# Altium PCB 电动手推车PCB.PcbDoc
Units mil, origin at the board's own origin, x right, y up, seen from the top; angles counter-clockwise.
Board outline 3897.64 x 2165.35 mil, 2 copper layers (Top Layer, Bottom Layer); 116 components, 78 nets, 368 pads, 298 vias.
Unrouted connection lines stored in the file: 5.
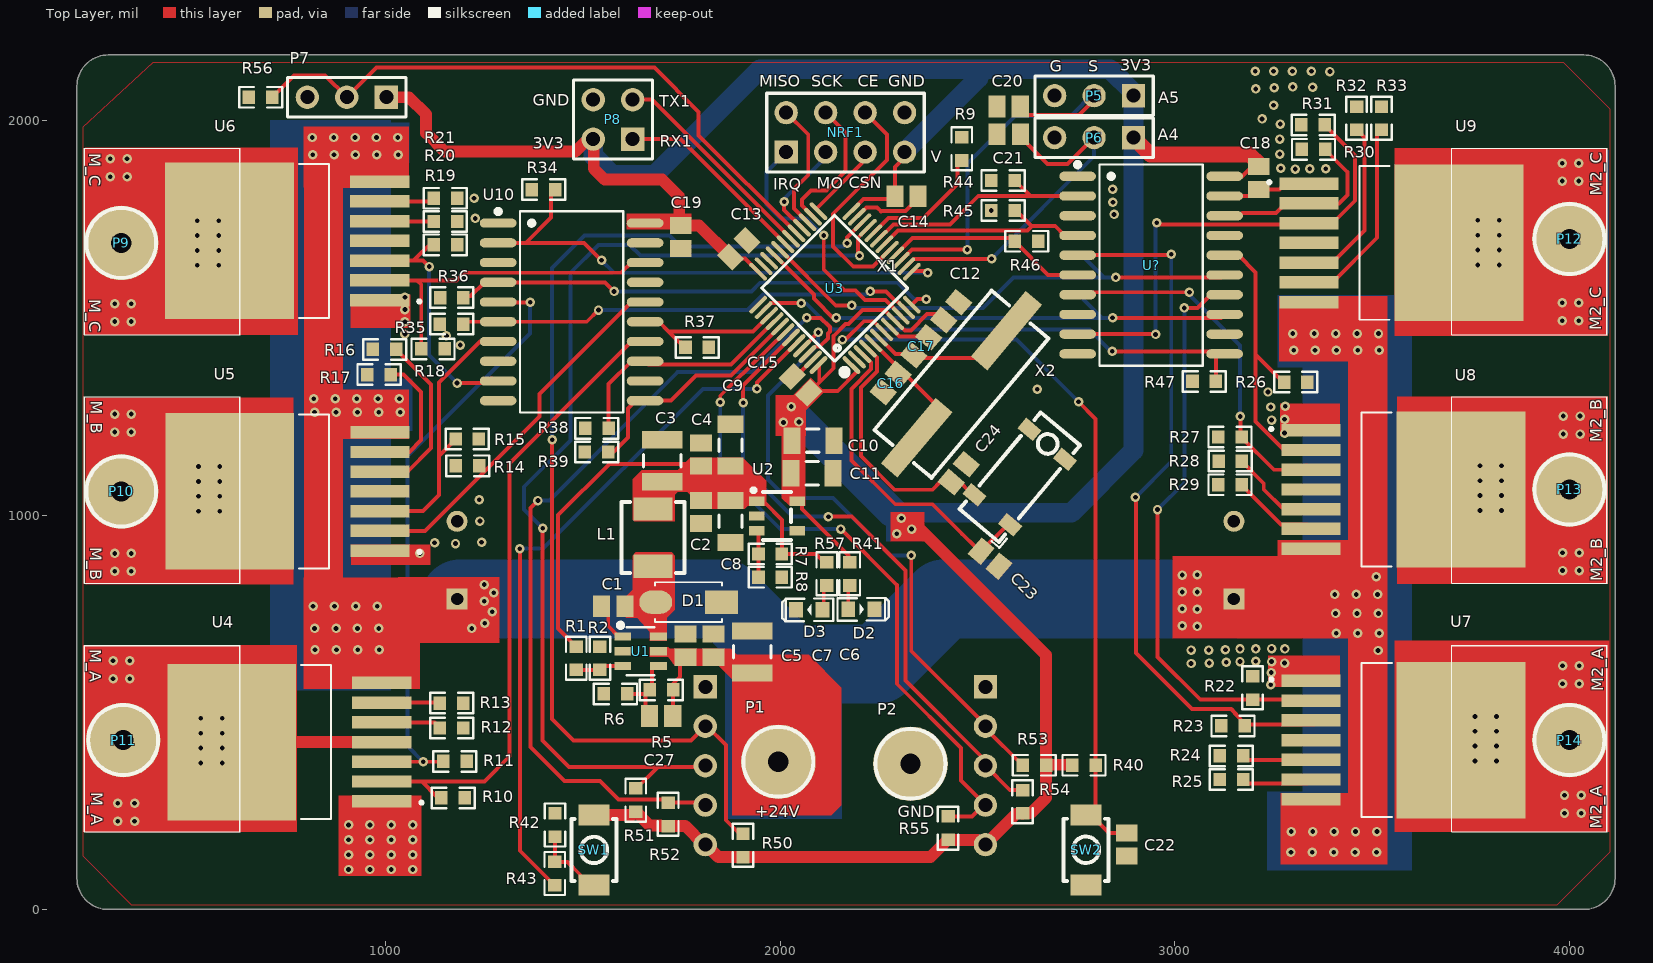
[diagram p0: Top Layer view]
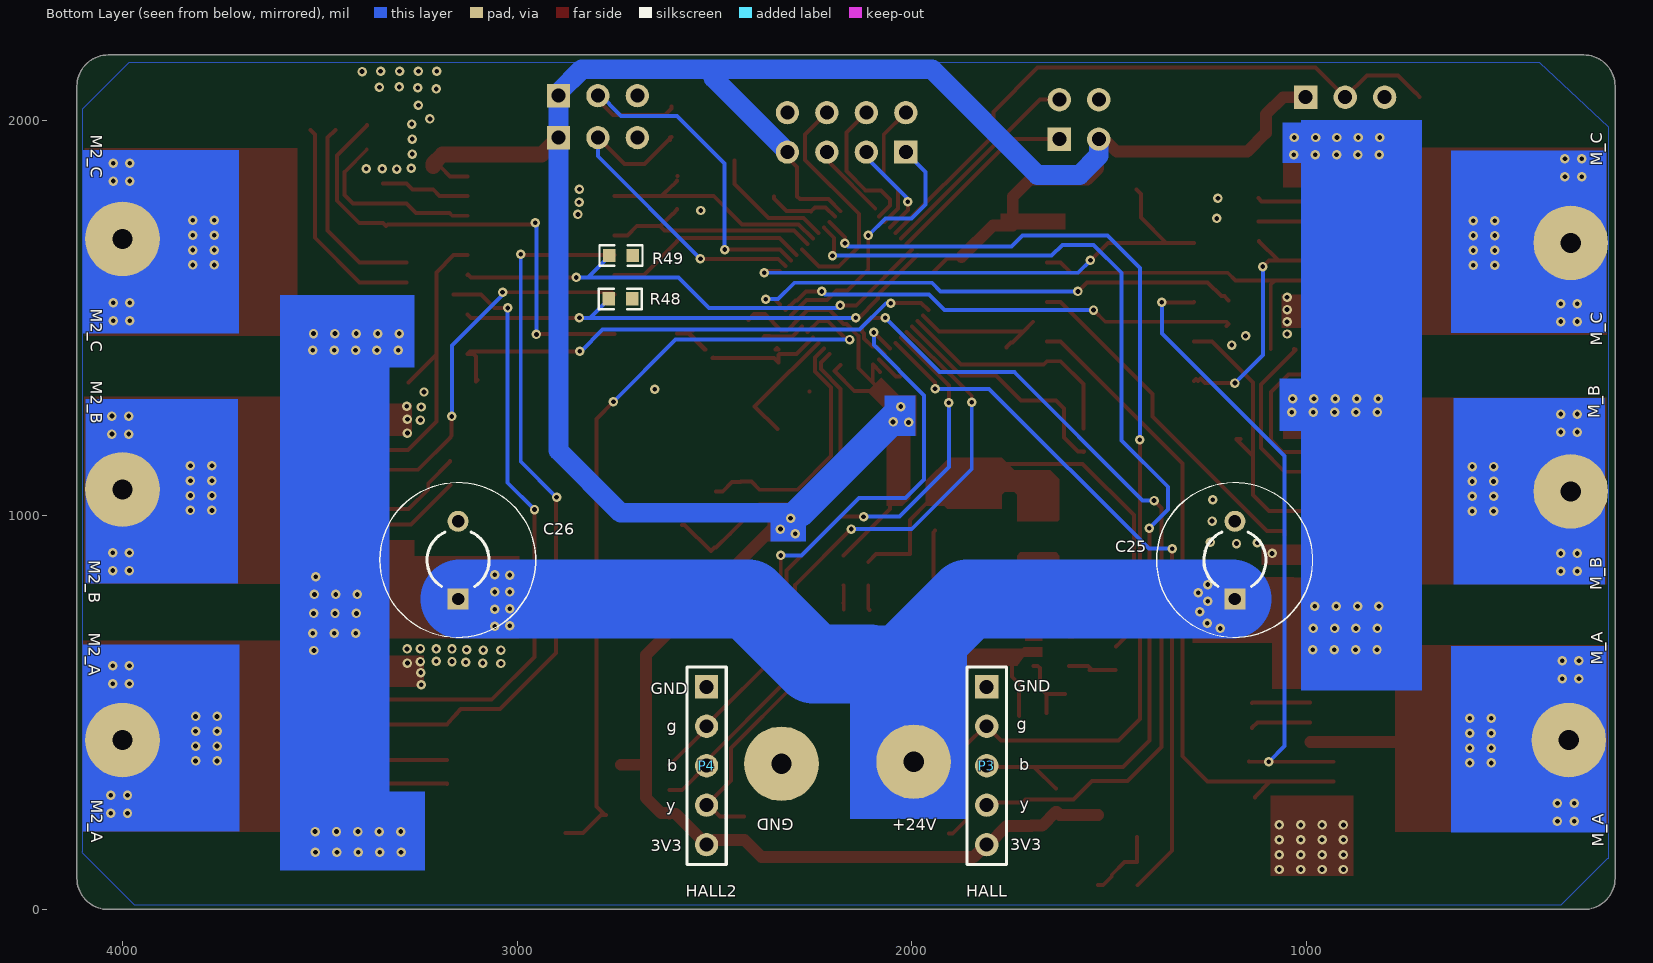
[diagram p1: Bottom Layer view, seen from below]

## Layer stack, top to bottom
Top Solder: solder mask 0.4, Solder Resist, Dk 3.5
Top Layer: signal copper 1.4
Dielectric 1: dielectric 12.6, FR-4, Dk 4.8
Bottom Layer: signal copper 1.4
Bottom Solder: solder mask 0.4, Solder Resist, Dk 3.5

## Board outline
217.78,79.51 ccw(c296.52,79.51) 296.52,0.77 4036.67,0.77 ccw(c4036.67,79.51) 4115.41,79.51 4115.41,2087.38 ccw(c4036.67,2087.38) 4036.67,2166.12 296.52,2166.12 ccw(c296.52,2087.38) 217.78,2087.38

## Design rules (kind name [scope] priority, off if disabled: settings)
Clearance [All] p1: gap=5 ignorepadtopadclearanceinfootprint=FALSE except(0: Arc-Hole Track-Hole SMDPad-Hole THPad-Hole Via-Hole Fill-Hole Poly-Hole Region-Hole Text-Hole)
ComponentClearance [All] p1: gap=0 collisioncheckmode=3 verticalgap=0 showdistances=FALSE
PlaneConnect [All] p1: planeconnectstyle=Direct reliefexpansion=20 reliefentries=4 reliefconductorwidth=10 reliefairgap=10
PolygonConnect [All] p1: connectstyle=Direct reliefconductorwidth=10 reliefentries=4 polygonreliefangle="90 Angle" airgapwidth=10
RoutingVias [All] p1: holewidth=28 width=50 viastyle="Through Hole" minholewidth=28 minwidth=50 maxholewidth=28 maxwidth=50
SolderMaskExpansion [All] p1: expansion=4
Width [All] p1: maxlimit=300 minlimit=10 preferedwidth=10
28 further rules are at their usual default settings.

## Components (designator, comment, footprint, x,y, rotation, side; value= is the part's Value field where it differs from the comment)
C1 "" C0805 1577,769 r180 top value=100nF
C2 "" C0805 1799.21,1007.87 r270 top value=10UF
C3 "" C1210 1700.79,1137.8 r270 top value=100UF
C4 "" C0805 1799.21,1153.54 r270 top value=0.1UF
C5 "" C0805 1759.84,669.29 r90 top value=10UF
C6 "" C1210 1929.13,653.54 r270 top value=100UF
C7 "" C0805 1830.71,669.29 r270 top value=0.1UF
C8 "" C1206 1874.02,984.25 r90 top value=0.1uF
C9 "" C1206 1874.02,1177.17 r270 top value=1uF
C10 "" C1206 2082.68,1188.98 r180 top value=1uF
C11 "" C1206 2080.71,1106.3 r180 top value=0.1uF
C12 "10u" C0805 2433,1517 r230 top
C13 "0.1u" C0805 1895,1675 r225 top
C14 "0.1u" C0805 2320,1808 r180 top
C15 "0.1u" C0805 2051.18,1330.71 r315 top
C16 "Cap" C0805 2279.53,1334.65 r50 top value=22PF
C17 "Cap" C0805 2357,1428 r230 top value=22PF
C18 "0.1u" C0805 3212.6,1854.33 r90 top
C19 "0.1u" C0805 1748.03,1704.72 r90 top
C20 "" C0805 2578.74,2035.43 r0 top value=104
C21 "" C0805 2579,1965 r0 top value=104
C22 "" C0805 2877.95,165.35 r90 top value=104
C23 "Cap" C0805 2531.5,889.76 r140 top value=22PF
C24 "Cap" C0805 2452.76,1106.3 r230 top value=22PF
C25 "Cap2" CAPR5-4X5 1181.1,885.83 r90 bottom value=100pF
C26 "Cap2" CAPR5-4X5 3149.61,885.83 r90 bottom value=100pF
C27 "" C0805 1698,491 r180 top value=22pf
D1 "Diode" SMA 1767.72,779.53 r0 top
D2 "LED3" LED0603-GREEN 2177.17,764.53 r0 top
D3 "LED3" LED0603-GREEN 2102.36,756.65 r180 top
L1 "Inductor" 0420-4.7μH 1677.17,870.08 r90 top value=6.8uh
NRF1 "Header 4X2" HDR2X4 2015,1920 r0 top locked
P1 "P1_C4.5" P1_C4.5 1995,375 r0 top
P2 "P1_C4.5" P1_C4.5 2330,370 r0 top
P3 "Header 5" HDR1X5 1810,565 r270 bottom
P4 "Header 5" HDR1X5 2520,565 r270 bottom
P5 "Header 3" HDR1X3 2895.28,2062.99 r180 top
P6 "Header 3" HDR1X3 2895.28,1956.69 r180 top
P7 "Header 3" HDR1X3 1001.57,2059.06 r180 top
P8 "Header 2X2" HDR2X2 1625.98,1952.76 r90 top
P9 "P1_C4.5" P1_C4.5 330,1690 r0 top
P10 "P1_C4.5" P1_C4.5 330,1060 r0 top
P11 "P1_C4.5" P1_C4.5 335,430 r0 top
P12 "P1_C4.5" P1_C4.5 4000,1700 r0 top
P13 "P1_C4.5" P1_C4.5 4000,1065 r0 top
P14 "P1_C4.5" P1_C4.5 4000,430 r0 top
R1 "" R0603 1483,604.07 r90 top value=36
R2 "" R0603 1543,670.61 r270 top value=10.7K
R5 "" R0603 1731.93,557 r180 top value=100K
R6 "" R0603 1615.61,547 r180 top value=14.3K
R7 "" R0603 2007.81,901.58 r180 top value=10K
R8 "" R0603 2007.81,842.52 r180 top value=100K
R9 "" R0603 2460,1961.61 r270 top value=10K
R10 "" R0603 1137.86,283.46 r0 top value=1K
R11 "" R0603 1142.07,376 r0 top value=1K
R12 "" R0603 1200.46,460.63 r180 top value=1K
R13 "" R0603 1200.46,523.62 r180 top value=1K
R14 "" R0603 1174.39,1125 r0 top value=1K
R15 "" R0603 1240.09,1192.91 r180 top value=1K
R16 "" R0603 964.07,1420 r0 top value=1K
R17 "" R0603 950.07,1356 r0 top value=1K
R18 "" R0603 1153.21,1421.26 r180 top value=1K
R19 "" R0603 1184.71,1685.04 r180 top value=1K
R20 "" R0603 1184.71,1744.1 r180 top value=1K
R21 "" R0603 1184.71,1803.15 r180 top value=1K
R22 "" R0603 3197,529.07 r90 top value=1K
R23 "" R0603 3180.61,466 r180 top value=1K
R24 "" R0603 3110,390 r0 top value=1K
R25 "" R0603 3110,330 r0 top value=1K
R26 "" R0603 3339.61,1337 r180 top value=1K
R27 "" R0603 3106.39,1198 r0 top value=1K
R28 "" R0603 3107.07,1137 r0 top value=1K
R29 "" R0603 3106.39,1077 r0 top value=1K
R30 "" R0603 3318.07,1927 r0 top value=1K
R31 "" R0603 3317.07,1989 r0 top value=1K
R32 "" R0603 3460.63,2039.04 r270 top value=1K
R33 "" R0603 3523.62,2039.04 r270 top value=1K
R34 "" R0603 1433.61,1825 r180 top value=1K
R35 "" R0603 1200.46,1484.25 r180 top value=1K
R36 "" R0603 1200.72,1551.18 r180 top value=1K
R37 "" R0603 1756.24,1425.2 r0 top value=1K
R38 "" R0603 1502.07,1220 r0 top value=1K
R39 "" R0603 1501.39,1160 r0 top value=1K
R40 "" R0603 2803.08,366.14 r180 top value=10K
R41 "" R0603 2176,884.61 r270 top value=2K
R42 "" R0603 1429.13,247.97 r270 top value=10K
R43 "" R0603 1428.51,58.48 r90 top value=2K
R44 "" R0603 2597.93,1848 r180 top value=1K
R45 "" R0603 2597.93,1772 r180 top value=1K
R46 "" R0603 2591.07,1694 r0 top value=1K
R47 "" R0603 3041.07,1339 r0 top value=1K
R48 "" R0603 2705.07,1548 r0 bottom value=1K
R49 "" R0603 2769.93,1658 r180 bottom value=1K
R50 "" R0603 1905.51,129.99 r90 top value=1K
R51 "" R0603 1633.86,244.42 r90 top value=1K
R52 "" R0603 1716,208.39 r90 top value=1K
R53 "" R0603 2677.1,366.14 r180 top value=1K
R54 "" R0603 2614.17,240.49 r90 top value=1K
R55 "" R0603 2425.2,173.56 r90 top value=1K
R56 "" R0603 649.94,2059.05 r0 top value=10K
R57 "" R0603 2118,884.61 r270 top value=2K
SW1 "" SW-SMD_L3.9-W3.0-P4.45 1529.65,66.41 r90 top
SW2 "" SW-SMD_L3.9-W3.0-P4.45 2776.89,66.73 r90 top
U1 "TPMP2359DJ" MP2359 1601.06,692.52 r270 top
U2 "RT9013-33GB" SOP23-5_L3.0_W1.7_P0.95_LS2.8_BR 1940.43,1033.86 r0 top
U3 "STM32F103C8T6" STM32F103C8T6 2182.77,1378.03 r45 top
U4 "BTS7960B" PG-TO263-7-1 988.19,277.24 r180 top
U5 "*" PG-TO263-7-1 983.19,912.24 r180 top
U6 "*" PG-TO263-7-1 982.87,1547.24 r180 top
U7 "BTS7960B" PG-TO263-7-1 3347.13,577.76 r0 top
U8 "*" PG-TO263-7-1 3346.81,1212.76 r0 top
U9 "*" PG-TO263-7-1 3341.81,1837.76 r0 top
U10 "SN74HC244DW" SOIC-20_L13.0-W7.6-P1.27-LS10.3-BL 1283.72,1737.24 r0 top
U? "SN74HC244DW" SOIC-20_L13.0-W7.6-P1.27-LS10.3-BL 2752.26,1855.91 r0 top
X1 "8MHz" HC-49S-SMD 2566.93,1468.5 r230 top
X2 "FR08S4-32.768-N06LLDT" OSC-SMD_4P-L8.0-W3.2-BL 2583.26,975.54 r50 top value=32.768kHz

## Footprints (in the part's own frame and the unit in brackets; to place one, negate y for a bottom-side part, rotate by r counter-clockwise, add the part's x,y. Pads: shape width x height; smd on the part's side, far side on the other; paste and mask are expansions set on the pad)
0420-4.7μH [mil]
  rect 59.1x98.4 smd mask+1.97: 1(0,0) 2(145.6,0)
  silkscreen extent -17,-80 163,80
C0805 [mm] "Chip Capacitor, Body 2.0x1.3mm, IPC High Density"
  rect 1.1x1.4 smd: 1(-0.75,0) 2(0.75,0)
  body extent -1.1,-0.72 1.1,0.72, height 1.4
C1206 [mm] "Chip Capacitor, Body 3.2x1.6mm, IPC High Density"
  rect 1.1x1.7 smd: 1(-1.35,0) 2(1.35,0)
  silkscreen extent -0.4,-0.75 0.4,0.75, body extent -1.7,-0.9 1.7,0.9, height 1.3
C1210 [mm] "Chip Capacitor, Body 3.2x2.5mm, IPC High Density"
  rect 1.1x2.6 smd: 1(-1.35,0) 2(1.35,0)
  silkscreen extent -0.4,-1.2 0.4,1.2, body extent -1.7,-1.35 1.7,1.35, height 1.3
CAPR5-4X5 [mm] "Capacitor; 2 Leads"
  rect 1.35x1.35 hole 0.8: 1(-2.5,0)
  round 1.35 hole 0.8: 2(2.5,0)
  silkscreen extent -1.69,-2 1.82,2
HC-49S-SMD [mm] "8Mhz晶振"
  rect 5.5x1.4 smd mask+0.051: 1(-0.083,0.14) 2(8.917,0.14)
  silkscreen extent -1.43,-2.26 10.27,2.54
HDR1X3 [mm] "Connector; Header; 3 Position"
  rect 1.5x1.5 hole 0.9: 1(0,0)
  round 1.5 hole 0.9: 2(2.54,0) 3(5.08,0)
  silkscreen extent -1.27,-1.27 6.35,1.27
HDR1X5 [mm] "Connector; Header; 5 Position"
  rect 1.5x1.5 hole 0.9: 1(0,0)
  round 1.5 hole 0.9: 2(2.54,0) 3(5.08,0) 4(7.62,0) 5(10.16,0)
  silkscreen extent -1.27,-1.27 11.43,1.27
HDR2X2 [mm] "Connector; Header; 2x2 Position"
  rect 1.5x1.5 hole 0.9: 1(0,0)
  round 1.5 hole 0.9: 2(0,2.54) 3(2.54,0) 4(2.54,2.54)
  silkscreen extent -1.27,-1.27 3.81,3.81
HDR2X4 [mm] "Connector; Header; 4x2 Position"
  rect 1.5x1.5 hole 0.9: 1(0,0)
  round 1.5 hole 0.9: 2(0,2.54) 3(2.54,0) 4(2.54,2.54) 5(5.08,0) 6(5.08,2.54) 7(7.62,0) 8(7.62,2.54)
  silkscreen extent -1.27,-1.27 8.89,3.81
LED0603-GREEN [mm] "SMT LED; 2 Flat Leads"
  rect 0.9x1 smd: 1(-0.124,-0.084) 2(1.576,-0.084)
  silkscreen extent -0.81,-0.81 2.48,0.65
MP2359 [mil] "SOT23-6"
  rect 20.95x42.2 smd mask+2: 1(0,0) 2(37.4,0) 3(74.8,0) 4(74.8,90.48) 5(37.4,90.48) 6(0,90.48)
  silkscreen extent -34,-12 98,80
OSC-SMD_4P-L8.0-W3.2-BL [mm] "32.769khz"
  rect 0.9x1.3 smd mask+0.051: 1(-0.016,0.008) 2(5.484,0.008) 3(5.484,3.008) 4(-0.016,3.008)
  silkscreen extent -1.58,-0.4 6.8,3.16
P1_C4.5 [mm]
  round 4.8 hole 1.3: 0(0,0)
  silkscreen extent -2.25,-2.25 2.25,2.25
PG-TO263-7-1 [mm] "BTS7960B"
  rect 3.81x0.8 smd: 1(-0.054,0.057) 2(-0.054,-1.213) 3(-0.054,-2.483) 4(-0.054,-3.753) 5(-0.054,-5.023) 6(-0.054,-6.293) 7(-0.054,-7.563)
  rect 8.29x10.07 smd paste-4.36: 8(9.606,-3.753)
  silkscreen extent -2.7,-8.7 5.15,1.2, body extent -1.55,-8.7 13.35,1.2, height 4.4
R0603 [mil]
  rect 31.75x34.02 smd mask+2: 1(3.61,0) 2(62.93,0)
  silkscreen extent -21,-26 88,26
SMA [mm]
  rect 2.12x1.5 smd: 1(2.115,0)
  oval 2.12x1.5 smd: 2(-2.115,0)
  silkscreen extent -2.16,-1.28 2.16,1.28
SOIC-20_L13.0-W7.6-P1.27-LS10.3-BL [mm] "74HC244DW"
  oval 2.36x0.595 smd mask+0.051: 1(0.033,0.07) 2(0.033,-1.2) 3(0.033,-2.47) 4(0.033,-3.74) 5(0.033,-5.01) 6(0.033,-6.28) 7(0.033,-7.55) 8(0.033,-8.82) 9(0.033,-10.09) 10(0.033,-11.36) 11(9.492,-11.36) 12(9.492,-10.09) 13(9.492,-8.82) 14(9.492,-7.55) 15(9.492,-6.28) 16(9.492,-5.01) 17(9.492,-3.74) 18(9.492,-2.47) 19(9.492,-1.2) 20(9.492,0.07)
  silkscreen extent -0.12,-12.12 8.08,0.97
SOP23-5_L3.0_W1.7_P0.95_LS2.8_BR [mm] "RT9013"
  rect 1x0.6 smd mask+0.051: 1(0.013,0.04) 2(0.013,-0.91) 3(0.013,-1.86) 4(2.613,-1.86) 5(2.613,0.04)
  silkscreen extent -0.34,-2.46 2.21,0.87
STM32F103C8T6 [mm]
  oval 0.27x1.5 smd mask+0.05: 1(0,0.085) 2(0.5,0.085) 3(1,0.085) 4(1.5,0.085) 5(2,0.085) 6(2.5,0.085) 7(3,0.085) 8(3.5,0.085) 9(4,0.085) 10(4.5,0.085) 11(5,0.085) 12(5.5,0.085) 25(5.5,8.585) 26(5,8.585) 27(4.5,8.585) 28(4,8.585) 29(3.5,8.585) 30(3,8.585) 31(2.5,8.585) 32(2,8.585) 33(1.5,8.585) 34(1,8.585) 35(0.5,8.585) 36(0,8.585)
  oval 1.5x0.27 smd mask+0.05: 13(7,1.585) 14(7,2.085) 15(7,2.585) 16(7,3.085) 17(7,3.585) 18(7,4.085) 19(7,4.585) 20(7,5.085) 21(7,5.585) 22(7,6.085) 23(7,6.585) 24(7,7.085) 37(-1.5,7.085) 38(-1.5,6.585) 39(-1.5,6.085) 40(-1.5,5.585) 41(-1.5,5.085) 42(-1.5,4.585) 43(-1.5,4.085) 44(-1.5,3.585) 45(-1.5,3.085) 46(-1.5,2.585) 47(-1.5,2.085) 48(-1.5,1.585)
  silkscreen extent -0.84,-0.12 6.05,7.68
SW-SMD_L3.9-W3.0-P4.45 [mm]
  rect 1.35x2 smd: 1(-0.087,0.053) 2(4.413,0.053)
  silkscreen extent 0.16,-1.4 4.16,1.5

## Part data
C1 C2 C3 C4 C5 C6 C7 C8 C9 C10 C11 C20 C21 C22 C27: library part Cap, "Capacitor", LatestRevisionDate=17-Jul-2002, LatestRevisionNote="Re-released for DXP Platform.", PackageReference=RAD-0.3, Published=8-Jun-2000, Publisher="Altium Limited"
C16 C17 C23 C24 C25 C26: "Capacitor", Publisher="Altium Limited"
  C16 C17 C23 C24: LatestRevisionDate=17-Jul-2002, LatestRevisionNote="Re-released for DXP Platform.", PackageReference=RAD-0.3, Published=8-Jun-2000
  C25 C26: PackageDescription="Capacitor; 2 Leads", PackageReference=CAPR5-4X5, Published=23-Sep-2002
D1: "Default Diode", Code_JEDEC=DO-214-AB, LatestRevisionDate=17-Jul-2002, LatestRevisionNote="Re-released for DXP Platform.", PackageDescription="DO-214-AB/SMC; 2 C-Bend Leads; Body 7.9 x 5.9 mm, inc. leads (LxW)", PackageReference=SMC, PackageVersion=Sep-1996, Published=8-Jun-2000, Publisher="Altium Limited"
D2 D3: "Typical BLUE SiC LED", DatasheetVersion=16-Apr-2002, LatestRevisionDate=17-Dec-2003, LatestRevisionNote="PCB Footprint replaced.", PackageDescription="SM LED; 2 C-Bend Leads; Body 3.5 x 2.8 x 1.9 mm, inc leads (LxWxH typ)", PackageReference=3.5X2.8X1.9, PackageVersion=16-Apr-2002, Published=8-Jun-2000, Publisher="Altium Limited"
NRF1: "Header, 4-Pin, Dual row", LatestRevisionDate=17-Jul-2002, LatestRevisionNote="Re-released for DXP Platform.", Publisher="Altium Limited"
P3 P4: "Header, 5-Pin", LatestRevisionDate=17-Jul-2002, LatestRevisionNote="Re-released for DXP Platform.", Publisher="Altium Limited"
P5 P6 P7: "Header, 3-Pin", LatestRevisionDate=17-Jul-2002, LatestRevisionNote="Re-released for DXP Platform.", Publisher="Altium Limited"
P8: "Header, 2-Pin, Dual row", LatestRevisionDate=17-Jul-2002, LatestRevisionNote="Re-released for DXP Platform.", Publisher="Altium Limited"
R1 R2 R5 R6 R10 R11 R12 R13 R14 R15 R16 R17 R18 R19 R20 R21 R22 R23 R24 R25 R26 R27 R28 R29 R30 R31 R32 R33 R34 R35 R36 R37 R38 R39 R44 R45 R46 R47 R48 R49 R50 R51 R52 R53 R54 R55: library part Res1, "Resistor", LatestRevisionDate=17-Jul-2002, LatestRevisionNote="Re-released for DXP Platform.", PackageReference=AXIAL-0.3, Published=8-Jun-2000, Publisher="Altium Limited"
R7 R8 R9 R40 R41 R42 R43 R56 R57: library part Res2, "Resistor", LatestRevisionDate=17-Jul-2002, LatestRevisionNote="Re-released for DXP Platform.", PackageReference=AXIAL-0.4, Published=8-Jun-2000, Publisher="Altium Limited"
SW1 SW2: library part TAEF-25R-V-T/R, BOM_Manufacturer=Diptronics, BOM_Manufacturer Part=TAEF-25R-V-T/R, BOM_Supplier=LCSC, BOM_Supplier Part=C495936, Contributor=LCSC, spicePre=S, spiceSymbolName=TAEF-25R-V-T/R
U1: JLCPCB Part Class="Extended Part", Manufacturer="TECH PUBLIC(Ì¨Ö", Add into BOM=yes, Convert to PCB=yes, Datasheet=https://atta.szlcsc.com/upload/public/pdf/source/20220124/136D7E5097025173C84A8EB547201C3F.pdf, Device=TPMP2359DJ, LCSC Part Name=TPMP2359DJ, Manufacturer Part=TPMP2359DJ, Name=TPMP2359DJ, Supplier=LCSC, Supplier Footprint=SOT23-6, Supplier Part=C2959845, Symbol=TPMP2359DJ
U2: Dropout Voltage=400mV@(500mA), JLCPCB Part Class="Extended Part", LCSC Part Name="正 Vin=5.5V Vout=3.3V 500mA 50dB@(10kHz)", Manufacturer=RICHTEK(Á¢è, Maximum Input Voltage=5.5V, Output Current=500mA, Output Voltage=3.3V, Power Supply Rejection Ratio (PSRR)=50dB@(10kHz), Quiescent Current (Ground Current)=-, Add into BOM=yes, Convert to PCB=yes, Datasheet=https://atta.szlcsc.com/upload/public/pdf/source/20150504/1457707282459.pdf, Device=RT9013-33GB, Feature=-, Manufacturer Part=RT9013-33GB, Name=RT9013-33GB, Noise=-, Number of Outputs=1, Output Polarity=正, Output Type=固?, Supplier=LCSC, Supplier Footprint=SOT-23-5, Supplier Part=C47773, Symbol=RT9013-33GB
U3: BOM_JLCPCB SMD=Yes, BOM_Manufacturer=STMicroelectronics, BOM_Manufacturer Part=STM32F103C8T6, BOM_Supplier=LCSC, BOM_Supplier Part=C8734, image=//image.lceda.cn/szlcsc/C8734.jpg, SMT Type=Basic, spicePre=U, spiceSymbolName=STM32F103C8T6, timeStamp=1455028086
U4 U7: "Half Bridge Driver DC Motors, General Purpose DMOS PG-TO263-7-1", Package="TO-263 Infineon", Availability="In Stock", Check_prices=https://www.snapeda.com/parts/BTS7960B/Infineon+Technologies/view-part/?ref=eda, MF=Infineon, MP=BTS7960B, Price=None, SnapEDA_Link=https://www.snapeda.com/parts/BTS7960B/Infineon+Technologies/view-part/?ref=snap
U5 U6 U8 U9: library part BTS7960B, "Half Bridge Driver DC Motors, General Purpose DMOS PG-TO263-7-1", Package="TO-263 Infineon", Availability="In Stock", Check_prices=https://www.snapeda.com/parts/BTS7960B/Infineon+Technologies/view-part/?ref=eda, MF=Infineon, MP=BTS7960B, Price=None, SnapEDA_Link=https://www.snapeda.com/parts/BTS7960B/Infineon+Technologies/view-part/?ref=snap
U10 U?: Current-OutputHigh=7.8mA, JLCPCB Part Class="Extended Part", Manufacturer=TI(德州, Operating temperature=-40℃~+85?, Supply Voltage=2V~6V, Add into BOM=yes, Convert to PCB=yes, Current-OutputLow=7.8mA, Device=SN74HC244DW, Input type=-, LCSC Part Name=SN74HC244DW, Manufacturer Part=SN74HC244DW, Name=SN74HC244DW, Output Type=三?, Supplier=LCSC, Supplier Footprint=SOIC-20, Supplier Part=C1548087, Symbol=SN74HC244DW, Type=»º³åÆ
X1: BOM_Manufacturer="ZheJiang East Crystal Elec", BOM_Manufacturer Part=C08000J060, BOM_Supplier=LCSC, BOM_Supplier Part=C259040, Contributor=LCSC, nameAlias=Frequency, spicePre=X, spiceSymbolName=C08000J060
X2: Equivalent Series Resistance (ESR)=50kΩ, Frequency Stability=±20ppm, JLCPCB Part Class="Extended Part", LCSC Part Name="32.768kHz ±20ppm 6pF", Load Capacitance=6pF, Manufacturer=HCI(º¼¾, Operating temperature=-40℃~+85?, Add into BOM=yes, Convert to PCB=yes, Crystal Type=ÌùÆ¬Î, Datasheet=https://atta.szlcsc.com/upload/public/pdf/source/20220525/0AFFB71AD450334CFFCC391A2D0E6102.pdf, Device=FR08S4-32.768-N06LLDT, Frequency Tolerance=±20ppm, Manufacturer Part=FR08S4-32.768-N06LLDT, Name=32.768kHz, Supplier=LCSC, Supplier Footprint=MC-306, Supplier Part=C2842183, Symbol=FR08S4-32.768-N06LLDT
C12: Contributor=LCEDA_Lib, nameAlias=Value(F), spicePre=C, spiceSymbolName=C_0805_US
C13 C14 C15 C18 C19: Contributor=LCEDA_Lib, nameAlias=Value(F), spicePre=C, spiceSymbolName=C_0402_US
L1: Code_IEC=1005, Code_JEITA=0402, LatestRevisionDate=29-May-2009, LatestRevisionNote="IPC-7351 Footprint Added.", PackageDescription="Chip Inductor", PackageReference=0402-A, Published=8-Jun-2000, Publisher="Altium Limited"

## Via types
v1: diameter 24, hole 12, Top Layer to Bottom Layer, 298 vias

## Nets (pads, with @x,y where several pads share a name; then routed paths per layer and width w, separated by ;. In a path a pad name is that pad's centre, name@x,y a point inside that pad or via, vN(x,y) a via of type N, cw(c..) or ccw(c..) an arc to the next point about the centre after c; other vN are vias at no path point)
3V3: C10.2 C11.2 C12.2 C13.2 C14.2 C15.2 C18.2 C19.2 NRF1.7 P3.5 P4.5 P5.1 P6.1 P7.1 P8.2 R40.2 R41.1 R50.1 R51.1 R52.1 R53.1 R54.1 R55.1 SW1.2 U2.5 U3.1 U3.9 U3.24 U3.36 U3.48 U10.20 U?.20 | length 9359.4
  Top Layer w10: U10.20 C19.2@1720.63,1740 ; C19.2@1735.47,1740.91 1742.13,1734.25 1744.09,1734.25 C19.2 ; C13.2 1878.3,1649.94 1910.85,1649.94 U3.36 ; 2055.12,1074.8 2055.12,1015.75 2173.23,897.64 ; U3.48@2079.89,1362.99 2079.89,1363.4 U3.48 2098.46,1381.97 2098.87,1381.97 2098.87,1336.64 ; U3.1 2195.55,1365.25 2195.55,1364.84 2144.71,1314.01 2076.24,1314.01 C15.2 2098.87,1336.64 ; U3.24 2211.13,1800.87 2283.34,1800.87 C14.2 2290.47,1882.2 2315,1906.73 NRF1.7 ; C12.2 2399.2,1509.2 2372.2,1509.2 2331,1468 2315.68,1468 2309.17,1474.51 2309,1474.51 U3.9 2263.82,1519.68 2208.66,1519.68 2173.23,1484.25 2165.74,1484.25 2135.48,1453.99 2135.48,1373.25 2098.87,1336.64 ; U?.20 3169.69,1858.66 3194.88,1883.86 C18.2@3206.69,1883.86
  Top Layer w30: P7.1 1059.06,2059.06 1102.36,2015.75 1102.36,1968.5 1149.61,1921.26 1480.31,1921.26 1511.81,1952.76 P8.2 1527.28,1951.46 1527.28,1878.23 1555.12,1850.39 1700.79,1850.39 1744.09,1807.09 C19.2@1744.09,1738.19 ; SW1.2 1624.85,240.16 1632.73,248.03 R51.1 1634.99,248.03 1669.81,213.21 1695.97,213.21 1696.85,212.33 1758.86,212.33 1806.19,165 P3.5 1812.1,165 1843.5,133.59 R50.1 2380.49,133.59 2424.06,177.17 R55.1 2499.97,177.17 2512.14,165 P4.5 R54.1@2598.22,243.22 ; C19.2@1735.47,1740.91 1741.38,1740.91 C19.2@1744.09,1738.19 ; C19.2@1744.09,1734.25 C19.2@1744.09,1738.19 ; C13.2 1793.99,1734.25 C19.2 C19.2@1744.09,1738.19 ; 2311.02,964.57 v1(2332.68,964.57) 2354.33,964.57 2673.49,645.4 R53.1@2673.49,367.27 ; R54.1 2615.05,244.97 2634.73,244.97 2673.49,283.73 R53.1 R53.1@2673.49,367.27 ; R40.2@2737.35,367.27 R53.1@2673.49,367.27
  Top Layer w40: P6.1 2937.97,1914 3189,1914 3212.6,1890.4 C18.2
  Bottom Layer w30: 2047.24,1218.76 v1(2047.24,1236.22) ; 2273.87,992.13 v1(2307.09,992.13) ; P5.1 P5.1@2895.28,2070.87
  Bottom Layer w40: v1(2028,1275) 2042,1275 2311.09,1005.91 ; 2047.24,1218.76 2273.87,992.13
  Bottom Layer w50: P8.2 1525.98,1911.02 1574.8,1862.2 1681.1,1862.2 1948.9,2130 2836.14,2130 P5.1@2895.28,2070.87 ; 2311.09,1005.91 2737.4,1005.91 2895.28,1163.78 P6.1 P5.1 ; NRF1.7 2502.62,2107.62
  other v1: 2295.28,952.76 2008,1235
3V5: C2.1 C3.2 C4.2 C8.2 C9.2 L1.2 R1.2 R7.1 R57.1 U2.1 | length 1054.8
  Top Layer w10: R1.2 1481.87,667 1470.99,677.88 1470.99,679.01 1437,713 1437,999.99 1566.93,1129.92 1793.31,1129.92 C4.2 ; U2.1 1944.87,1031.5 1960.63,1031.5 2004.2,987.92 R7.1 2090.3,901.57 R57.1@2110.24,881.64
A4: C21.2 P6.2 U3.14 | length 887.5
  Top Layer w10: U3.14 2338.25,1649.61 v1(2535.43,1649.61) ; C21.2@2608.27,1958.66 C21.2@2612.2,1954.72 ; C21.2@2612.2,1950.79 C21.2@2612.2,1954.72 ; C21.2@2612.2,1956.69 C21.2@2612.2,1954.72 ; P6.2 2728.35,1889.76 2677.17,1889.76 C21.2@2612.2,1954.72
  Bottom Layer w10: v1(2535.43,1649.61) 2795.28,1909.45 P6.2
A5: C20.2 P5.2 U3.15 | length 1024.8
  Top Layer w10: U3.15 2333.81,1673 v1(2474,1673) ; C20.2 2608.27,2030.65 2624.92,2014 2757,2014 2795.28,2052.28 P5.2 ; P5.2@2791.34,2066.93 P5.2@2795.28,2070.87
  Bottom Layer w10: v1(2474,1673) 2474,1891.32 2594.49,2011.81 2736.22,2011.81 P5.2@2795.28,2070.87
A8: P7.2 R56.2 U3.29 | length 1614.1
  Top Layer w10: R56.2 712.86,2060.19 723.74,2071.06 724.87,2071.06 767.98,2114.17 846.46,2114.17 P7.2 976.38,2133.86 1681.1,2133.86 1793.19,2021.77 1793.19,1962.48 U3.29
BOOT0: R43.1 U3.44 | length 1816.6
  Top Layer w10: v1(1340,915) 1340,149.47 1427.38,62.09 R43.1 ; v1(1941,1320) 1941,1335.86 U3.44
  Bottom Layer w10: v1(1340,915) 1399,915 1804,1320 v1(1941,1320)
BOOT1: R9.2 U3.20 | length 324.3
  Top Layer w10: U3.20 2274.61,1753 2363.24,1753 2449,1838.76 R9.2@2449,1898.68
CE: NRF1.6 U3.17 | length 601
  Top Layer w10: NRF1.6 2270,1965 2270,1899.92 2133.86,1763.78 2133.86,1681.1 2185.04,1629.92 2234.89,1629.92 2277.67,1672.7 U3.17
CSN: NRF1.5 U3.25 | length 193.2
  Top Layer w10: U3.25@2092.5,1777.5 2205.61,1890.61 2205.61,1910.61 NRF1.5
GND: C2.2 C3.1 C4.1 C5.2 C6.1 C7.1 C8.1 C9.1 C10.1 C11.1 C12.1 C13.1 C14.1 C15.1 C16.1 C17.1 C18.1 C19.1 C20.1 C21.1 C22.1 C23.1 C24.1 C25.2 C26.2 D1.1 D2.2 D3.2 NRF1.8 P2.0 P3.1 P4.1 P5.3 P6.3 P7.3 P8.4 R2.1 R6.2 R8.1 R9.1 R10.2 R11.2 R12.1 R13.1 R14.1 R15.1 R16.1 R17.1 R18.1 R19.1 R20.1 R21.1 R22.2 R23.2 R24.1 R25.1 R26.1 R27.1 R28.1 R29.1 R30.1 R31.1 R32.1 R33.1 R34.2 R35.2 R36.2 R37.2 R38.1 R39.1 R42.1 R44.2 R45.2 R46.2 R47.1 R48.1 R49.2 R56.1 SW2.1 U1.2 U2.2 U3.8 U3.23 U3.35 U3.47 U4.1 U5.1 U6.1 U7.1 U8.1 U9.1 U10.1 U10.8 U10.10 U10.17 U10.19 U?.1 U?.8 U?.10 U?.17 U?.19 X2.2 X2.3 | length 596.6
  Top Layer w10: C15.1 2040.23,1351.59 U3.47 ; U3.23 2194.49,1756.22 2218.27,1780 2245,1780 2255,1770 2255.44,1770.44 2317.87,1770.44 2349.53,1802.09 C14.1 ; C16.1@2258.65,1313.77 C16.1@2259.73,1313.77 ; U3.8 2302.68,1453 2360,1453 2360.82,1453.82 2372.78,1453.82 C17.1 ; U?.19 3196.46,1808.66 C18.1 3265.24,1824.8 3280.43,1840 U9.1
  other v1: 906,102 960.25,102 1014.5,102 1068.75,102 906,139.67 960.25,139.67 1014.5,139.67 1068.75,139.67 906,177.33 960.25,177.33 1014.5,177.33 1068.75,177.33 906,215 960.25,215 1014.5,215 1068.75,215 3243,570 3244,601 3041,624 3087,625 3278,625 3130,627 3165,629 3245,629 3205,630 3041,658 3086,658 3128,659 3165,661 3205,661 3279,661 3245,662 1087,903 1177,928 1124,930 1243,931 1239,985 1237,1039 3278,1208 3245,1241 3278,1243 3243,1274 3280,1276 3236,1312 2651,1319 1189,1431 1154,1454 1049,1459 1049,1490 1049,1521 1049,1552 1227,1752 2846,1762 2535,1772 2843,1793 1224,1803 2842,1826 3305,1877 3342,1878 3382,1878 3268,1879 3266,1915 3266,1953 3267,1991 3221,2004 3250,2039 3205,2080 3252,2083 3349,2084 3299,2085 3393,2124 3204,2125 3250,2125 3298,2125 3346,2125
hall2_b: P4.3 R54.2 U3.43 | length 1596.9
  Top Layer w10: v1(1906,1285) 1906,1328.71 U3.43 ; v1(2122.05,996.06) 2181.1,996.06 2317,860.17 2317,580.64 2520,377.64 P4.3 2581.59,303.41 R54.2
  Bottom Layer w10: v1(1906,1285) 1906,1121.56 2031.5,996.06 v1(2122.05,996.06)
hall2_g: P4.2 R53.2 U3.45 | length 1575.3
  Top Layer w10: U3.45 v1(2096.01,1463.04) ; v1(2332,898) 2332,656.19 2520,468.19 P4.2 2520,459.45 2613.17,366.27 R53.2@2614.31,366.27
  Bottom Layer w10: v1(2096.01,1463.04) 2096.01,1430.66 1969,1303.65 1969,1090.06 2015.75,1043.31 2133.86,1043.31 2279.17,898 v1(2332,898)
hall2_y: P4.4 R55.2 U3.42 | length 1743.5
  Top Layer w10: v1(1848,1286) 1848,1302.48 1881.89,1336.37 U3.42 ; v1(2153.54,964.57) 2295.28,822.83 2295.28,572.72 2458,410 2458,327 P4.4 2514.06,265 2485.54,236.49 R55.2
  Bottom Layer w10: v1(1848,1286) 1848,1116.57 2000,964.57 v1(2153.54,964.57)
hall_b: P3.3 R51.2 U3.21 | length 2636.8
  Top Layer w10: v1(1398,967) 1398,428.77 1464.57,362.2 1689.84,362.2 ; R51.2 1634.99,307.35 1689.84,362.2 ; P3.3@1818.9,362.2 1689.84,362.2 ; v1(2200.79,1657.48) 2196.85,1661.42 2196.85,1702.9 2222.16,1728.21 U3.21
  Bottom Layer w10: v1(1398,967) 1351,1014 1351,1071.89 1468.5,1189.39 1468.5,1614.17 1539.37,1685.04 1618.11,1685.04 1645.67,1657.48 v1(2200.79,1657.48)
hall_g: P3.2 R50.2 U3.22 | length 2753.8
  Top Layer w10: v1(1422,1191) 1422,483.51 1476.38,429.13 1774.13,429.13 P3.2 1814.53,465 1862.2,417.32 1862.2,226.8 1896.09,192.91 R50.2 ; v1(2169.29,1688.98) 2169.29,1703.36 U3.22
  Bottom Layer w10: v1(1422,1191) 1422,1626.72 1503.94,1708.66 1719.49,1708.66 1747.05,1681.1 2161.42,1681.1 v1(2169.29,1688.98)
hall_y: P3.4 R52.2 U3.46 | length 2182.6
  Top Layer w10: v1(1386,1037) 1367,1018 1367,412.53 1452.76,326.77 1543.31,326.77 1590.55,279.53 1711.47,279.53 1719.35,271.65 1790.07,271.65 1796.73,265 P3.4 ; v1@2062.99,1503.94 v1(2066.93,1500) 2102.36,1500 2125.98,1476.38 2125.98,1465.71 2120.48,1460.21 2120.48,1447.25 2099.99,1426.76 2087.74,1426.76 2069.22,1408.24 U3.46
  Bottom Layer w10: v1(1386,1037) 1414.95,1037 1740.16,1362.2 1929.13,1362.2 v1(2066.93,1500)
I2_U: R49.1 U3.32 U?.15 | length 1301.7
  Top Layer w10: U3.32 2140.66,1531.5 v1(2181.1,1531.5) ; v1(2850.39,1602.36) 3116.54,1602.36 3124.41,1610.24 U?.15
  Bottom Layer w10: v1(2181.1,1531.5) 2187.35,1525.24 2513.43,1525.24 2590.55,1602.36 2820.83,1602.36 ; R49.1 2766.32,1656.87 2820.83,1602.36 ; v1(2850.39,1602.36) 2820.83,1602.36
I2_V: R48.2 U3.33 U?.13 | length 1294.5
  Top Layer w10: U3.33 2085,1559.32 2085,1548.89 2137.81,1496.08 2141.73,1492.16 v1(2141.73,1500) ; v1(2842,1500) 3117.32,1500 U?.13
  Bottom Layer w10: v1(2141.73,1500) 2814.87,1500 ; R48.2 2768,1546.87 2814.87,1500 ; v1(2842,1500) 2814.87,1500
I2_W: R47.2 U3.38 U?.11 | length 1318.7
  Top Layer w10: U3.38 1976.22,1538.11 2052.05,1538.11 v1(2053.21,1536.96) ; v1(2841,1415) 3119.65,1415 U?.11 3110.2,1408.66 3104,1402.46 R47.2 ; R47.2@3100.06,1341.8 R47.2@3100.06,1342.94
  Bottom Layer w10: v1(2053.21,1536.96) 2065.4,1536.96 2132.24,1470.13 2783.46,1470.13 2838.59,1415 v1(2841,1415)
I_U: R37.1 U3.39 U10.15 | length 366.4
  Top Layer w10: U10.15@1692.18,1490 1717.18,1465 ; R37.1 1759.84,1426.33 1748.97,1437.2 1744.98,1437.2 1717.18,1465 ; U3.39 1930.93,1465 1717.18,1465
I_V: R38.2 U3.40 U10.13 | length 605.6
  Top Layer w10: R38.2 1565,1332.3 1622.7,1390 U10.13 1665.55,1381.89 1875.67,1381.89 U3.40
I_W: R39.2 U3.41 U10.11 | length 612.6
  Top Layer w10: R39.2 1562.9,1161.42 1578.74,1161.42 1614.17,1196.85 1614.17,1270.28 1633.9,1290 U10.11 1723.07,1290 1786.92,1353.85 1875.46,1353.85 U3.41
INH2_U: R23.1 U7.3 U?.5 | length 1813.3
  Top Layer w10: U?.5 2988.66,1658.66 v1(2990.83,1660.83) ; v1(2900,1045) 2901,1044 2901,651 3043,509 3142.82,509 3177.88,470 U7.3@3352,470
  Bottom Layer w10: v1(2900,1045) 2990.83,1135.83 v1(2990.83,1660.83)
INH2_V: R27.2 U8.3 U?.7 | length 933.2
  Top Layer w10: U?.7 2759.71,1564.83 v1(3036.83,1564.83) ; v1(3166,1250) 3166,1201.32 R27.2 3169.32,1196.87 3251.19,1115 U8.3 U8.3@3333.94,1125.75
  Bottom Layer w10: v1(3036.83,1564.83) 3036.83,1558.17 3165.5,1429.5 3165.5,1250.5 v1(3166,1250)
INH2_W: R31.2 U9.3 U?.9 | length 1239
  Top Layer w10: U?.9 2950.34,1458.66 v1(2951,1458) ; v1(2954,1741) 2958.05,1736.95 3327.3,1736.95 3331.97,1732.28 U9.3 3400,1740 3456.69,1796.69 3456.69,1911.17 3380,1987.87 R31.2
  Bottom Layer w10: v1(2951,1458) 2951,1738 v1(2954,1741)
INH_U: R11.1 U4.3 U10.5 | length 1606.3
  Top Layer w10: U4.3@931.06,375 U4.3 v1(1095,375) 1144.68,375 R11.1 ; U10.5 1285.63,1539.37 v1(1366.14,1539.37)
  Bottom Layer w10: v1(1095,375) 1055,415 1055,1149.49 1366.14,1460.63 v1(1366.14,1539.37)
INH_V: R15.2 U5.3 U10.7 | length 716
  Top Layer w10: U5.3 1095,1010 1135.48,1050.48 1135.48,1150.1 ; R15.2@1166.49,1192.91 R15.2 1177.17,1191.78 1135.48,1150.1 ; U10.7 1239.21,1440 1135.48,1336.27 1135.48,1150.1
INH_W: R19.2 U6.3 U10.9 | length 642
  Top Layer w10: U6.3 1071.13,1645 ; v1(1110.24,1629.92) 1095.16,1645 1071.13,1645 ; R19.2@1120,1695 1120,1693.87 1071.13,1645 ; v1(1181.1,1334.65) 1256.73,1334.65 1268.54,1346.46 1275,1340 1280,1345 U10.9
  Bottom Layer w10: v1(1110.24,1629.92) 1110.24,1405.51 v1(1181.1,1334.65)
IRQ: NRF1.1 U3.10 | length 661.4
  Top Layer w10: v1(2110.24,1708.66) 2110.24,1622.05 2162.8,1569.48 2190.36,1569.48 2214.91,1544.93 2266.43,1544.93 U3.10
  Bottom Layer w10: NRF1.1 1965,1870 1965,1787.4 2000.43,1751.97 2066.93,1751.97 v1(2110.24,1708.66)
M2_A: P14.0 U7.4 U7.8
  other v1: 3987.33,244.5 4029.67,244.5 3987.33,290 4029.67,290 3760.5,377 3814.75,377 3760.5,414.67 3814.75,414.67 3760.5,452.33 3814.75,452.33 3760.5,490 3814.75,490 3982.33,572.5 4024.67,572.5 3982.33,618 4024.67,618
M2_B: P13.0 U8.4 U8.8
  other v1: 3982.33,859.5 4024.67,859.5 3982.33,905 4024.67,905 3773.5,1012 3827.75,1012 3773.5,1049.67 3827.75,1049.67 3773.5,1087.33 3827.75,1087.33 3773.5,1125 3827.75,1125 3984.33,1205.5 4026.67,1205.5 3984.33,1251 4026.67,1251
M2_C: P12.0 U9.4 U9.8
  other v1: 3981.33,1492.5 4023.67,1492.5 3981.33,1538 4023.67,1538 3767.5,1634 3821.75,1634 3767.5,1671.67 3821.75,1671.67 3767.5,1709.33 3821.75,1709.33 3767.5,1747 3821.75,1747 3981.33,1846.5 4023.67,1846.5 3981.33,1892 4023.67,1892
M_A: P11.0 U4.4 U4.8 | length 380.3
  Top Layer w30: U4.8 U4.4
  other v1: 321.33,224.5 363.67,224.5 321.33,270 363.67,270 531.5,372 585.75,372 531.5,409.67 585.75,409.67 531.5,447.33 585.75,447.33 531.5,485 585.75,485 309.33,585.5 351.67,585.5 309.33,631 351.67,631
M_B: P10.0 U5.4 U5.8
  other v1: 313.33,857.5 355.67,857.5 313.33,903 355.67,903 525.5,1010 579.75,1010 525.5,1047.67 579.75,1047.67 525.5,1085.33 579.75,1085.33 525.5,1123 579.75,1123 313.33,1210.5 355.67,1210.5 313.33,1256 355.67,1256
M_C: P9.0 U6.4 U6.8
  other v1: 313.33,1490.5 355.67,1490.5 313.33,1536 355.67,1536 522.5,1633 576.75,1633 522.5,1670.67 576.75,1670.67 522.5,1708.33 576.75,1708.33 522.5,1746 576.75,1746 302.33,1857.5 344.67,1857.5 302.33,1903 344.67,1903
MISO: NRF1.2 U3.27 | length 329.8
  Top Layer w10: NRF1.2 2070.87,1964.13 2070.87,1862.2 2035,1826.34 2035,1776.53 2069.05,1742.47 U3.27
MOSI: NRF1.3 U3.28 | length 253.8
  Top Layer w10: v1(2010,1794) 2010,1773.51 U3.28
  Bottom Layer w10: v1(2010,1794) 2010,1801.34 2115,1906.34 NRF1.3
NetC1_1: C1.1 D1.2 L1.1 U1.6
NetC1_2: C1.2 U1.1 | length 104.9
  Top Layer w10: C1.2 1564.13,752.35 1564.13,718.82 1590.43,692.52 U1.1
NetC16_2: C16.2 U3.5 X1.2 | length 309.7
  Top Layer w10: U3.5 2303.03,1369.12 2304.12,1369.12 2308.3,1364.94 2398.02,1275.22 X1.2@2340.66,1217.86
NetC17_2: C17.2 U3.6 X1.1 | length 490.4
  Top Layer w10: U3.6 2250.17,1450 2291.59,1408.58 2334.82,1408.58 C17.2 2338.02,1386.98 2349.04,1398 2504.99,1398 X1.1@2503.04,1399.94 ; C17.2@2338.02,1420 C17.2@2345.33,1420 ; C17.2@2341.33,1424 C17.2@2345.33,1420 ; C17.2@2345.5,1419.83 C17.2@2345.33,1420 ; X1.1@2554.84,1467.46 X1.1 X1.1@2566.34,1460.55 ; X1.1@2595.55,1460.55 X1.1@2566.34,1460.55 ; X1.1@2566.34,1460.55 2563.65,1460.55 2522.92,1419.83 2525.62,1419.83 X1.1@2566.34,1460.55
NetC27_2: C27.2 R5.2 R6.1 U1.4 | length 185.4
  Top Layer w10: R6.1 R5.2@1658.24,547 ; C27.2@1658.24,499 R5.2@1658.24,547 ; U1.4 1680.91,617.72 1675.44,612.24 1675.44,563.44 R5.2 1659,547 R5.2@1658.24,547
NetD2_1: D2.1 R41.2 | length 62.8
  Top Layer w10: D2.1 D2.1@2172.28,776.22 ; D2.1@2173.23,777.17 D2.1@2172.28,776.22 ; R41.2@2173.23,822.32 2172.28,821.37 D2.1@2172.28,776.22
NetD3_1: D3.1 R57.2 | length 63.6
  Top Layer w10: D3.1 2110.24,762.95 R57.2@2110.24,822.32
NetR1_1: R1.1 R2.2 U1.3 | length 124.6
  Top Layer w10: R1.1 R2.2 1553.04,617.72 U1.3 ; R2.2@1547.65,607.32 1548.32,607.98 R2.2@1549.37,606.93
NetR7_2: R7.2 R8.2 U2.3 | length 119.7
  Top Layer w10: U2.3 1944.88,956.69 R7.2 R8.2
NetR12_2: R12.2 U4.5 | length 153.8
  Top Layer w10: U4.5 1124.29,475 1137.53,461.76 R12.2
NetR13_2: R13.2 U4.6 | length 147.8
  Top Layer w10: U4.6 1136.15,525 R13.2
NetR16_2: R16.2 U5.5 | length 442.1
  Top Layer w10: U5.5 1055,1110 1115,1170 1115,1330.87 1027,1418.87 R16.2 ; R16.2@1031.5,1420.13 R16.2@1031.5,1421.26
NetR17_2: R17.2 U5.6 | length 335.3
  Top Layer w10: U5.6 1060,1160 1090,1190 1090,1311.57 1045.57,1356 R17.2 ; R17.2@1011.81,1357.14 R17.2@1011.81,1358.27
NetR20_2: R20.2 U6.5 | length 137.2
  Top Layer w10: U6.5 985.91,1744.09 R20.2
NetR21_2: R21.2 U6.6 | length 140.2
  Top Layer w10: U6.6 1113.63,1795 R21.2
NetR24_2: R24.2 U7.5 | length 167.8
  Top Layer w10: R24.2@3177.25,380 U7.5
NetR25_2: R25.2 U7.6 | length 173
  Top Layer w10: R25.2@3177.25,318.87 3177.25,320 3335,320 U7.6
NetR28_2: R28.2 U8.5 | length 250.4
  Top Layer w10: R28.2 3170,1135.87 3225.19,1080.68 3225.19,1064.81 3275,1015 U8.5 U8.5@3333.94,1025.75
NetR29_2: R29.2 U8.6 | length 222.4
  Top Layer w10: R29.2 3169.32,1075.87 3269.44,975.75 3333.94,975.75 U8.6
NetR32_2: R32.2 U9.5 | length 496.5
  Top Layer w10: U9.5@3280.43,1640 U9.5 3398.94,1640 3480.32,1721.38 3480.32,1956.43 R32.2
NetR33_2: R33.2 U9.6 | length 556.3
  Top Layer w10: U9.6@3280.43,1590 U9.6 3398.94,1590 3511.81,1702.87 3511.81,1964.3 R33.2
NetR42_2: R42.2 R43.2 SW1.1 | length 189.6
  Top Layer w10: R42.2 1429.13,122.03 R43.2 1460.52,121.41 1493.19,88.74 1493.19,84.56 1514.76,62.99 SW1.1
OS32_IN: C23.2 U3.3 X2.1 | length 824.6
  Top Layer w10: U3.3 2208.24,1408.07 2230,1386.31 2230,1370 2180,1320 2180,1138.9 2291.34,1027.56 2385.83,1027.56 2460.63,952.76 2495.6,917.79 2499.83,917.79 C23.2 2509.11,908.74 2575.62,975.26 X2.1
OS32_OUT: C24.2 U3.4 X2.4 | length 643.5
  Top Layer w10: U3.4 2222.16,1421.99 2245,1399.15 2245,1363.79 2204.72,1323.51 2204.72,1149.61 2289.94,1064.39 2385.4,1064.39 2405.82,1084.81 2432.65,1084.81 C24.2 2455.15,1083.68 2478.93,1059.9 X2.4@2495.48,1059.9
P2_U: R46.1 U3.16 U?.6 | length 519.7
  Top Layer w10: U3.16 2334.97,1702 2587.81,1702 2594.68,1695.13 R46.1 2594.68,1692.87 2678.89,1608.66 U?.6
P2_V: R45.1 U3.18 U?.4 | length 579.2
  Top Layer w10: U3.18 2298.3,1721.01 2626.52,1721.01 2637.8,1732.28 2696.85,1732.28 2720.47,1708.66 U?.4 ; R45.1@2594.49,1775.59 2594.49,1774.46 2605.36,1763.58 2606.5,1763.58 2637.05,1733.03
P2_W: R44.1 U3.19 U?.2 | length 605.8
  Top Layer w10: U3.19 2286.46,1737 2430.07,1737 2501.73,1808.66 2633.66,1808.66 ; R44.1@2593.75,1858.82 R44.1@2593.75,1859.95 ; R44.1 2594.32,1846.87 2605.2,1835.99 2606.33,1835.99 2633.66,1808.66 ; U?.2 2633.66,1808.66
P_U: R35.1 U3.11 U10.6 | length 1183.7
  Top Layer w10: R35.1@1201.85,1479.25 R35.1 1202.6,1490 U10.6 1509.68,1490 v1(1539.37,1519.68) ; v1(2228.35,1566.93) 2268.07,1566.93 2290.61,1544.39 2294.8,1544.39 U3.11
  Bottom Layer w10: v1(1539.37,1519.68) 1917.32,1519.68 1956.69,1559.06 2220.47,1559.06 v1(2228.35,1566.93)
P_V: R36.1 U3.12 U10.4 | length 1271.2
  Top Layer w10: R36.1@1197.12,1543.31 1197.12,1544.44 1207.99,1555.32 1215.57,1555.32 1250.26,1590 U10.4 1555.67,1590 v1(1578.74,1566.93) ; U3.12 2347.24,1547.24 v1(2370.08,1547.24)
  Bottom Layer w10: v1(1578.74,1566.93) 1926.82,1566.93 1948.82,1588.93 2296.9,1588.93 2338.58,1547.24 v1(2370.08,1547.24)
P_W: R34.1 U3.13 U10.2 | length 1329.8
  Top Layer w10: U10.2 1355,1690 ; R34.1 1419.12,1814.12 1419.12,1754.12 1355,1690 ; v1(1547.24,1645.67) 1502.91,1690 1355,1690 ; U3.13 2335.54,1619.05 2369.14,1619.05 v1(2374.02,1614.17)
  Bottom Layer w10: v1(1547.24,1645.67) 1578.74,1614.17 v1(2374.02,1614.17)
PWM2_U: R22.1 U7.2 U?.14 | length 1497.8
  Top Layer w10: v1(2956,1014) 2956,641 3064.32,532.68 R22.1 3342.32,532.68 U7.2 ; v1(3024,1525) 3057.58,1525 3091.24,1558.66 U?.14 U?.14@3160.73,1558.66
  Bottom Layer w10: v1(2956,1014) 3024,1082 v1(3024,1525)
PWM2_V: R26.2 U8.2 U?.16 | length 745
  Top Layer w10: U?.16 3160.73,1658.66 3204.72,1614.67 3204.72,1407.09 ; R26.2@3275.18,1335.5 3275.18,1336.63 3204.72,1407.09 ; U8.2 3277,1165 3204.72,1237.28 3204.72,1407.09
PWM2_W: R30.2 U9.2 U?.18 | length 472
  Top Layer w10: U?.18 3164.36,1758.66 3171.45,1765.75 3256.18,1765.75 3280.43,1790 U9.2 3415.98,1790 3437.01,1811.02 3437.01,1870.08 3436.79,1870.08 3381,1925.87 R30.2
PWM_U: R10.1 U4.2 U10.14 | length 1679.2
  Top Layer w10: U4.2@931.06,325 U4.2 1091.81,325 ; R10.1@1130.68,285 1130.68,286.13 1091.81,325 ; U10.14 1622.7,1440 1314,1131.3 1314,389 1250,325 1091.81,325
PWM_V: R14.2 U5.2 U10.16 | length 887.1
  Top Layer w10: U5.2@1055.32,949.25 1055,949.57 1055,960 1100,960 1390,1250 1390,1307.3 1622.7,1540 U10.16
PWM_W: R18.2 U6.2 U10.18 | length 869.1
  Top Layer w10: U6.2 1080,1595 ; R18.2 1090.29,1584.71 1080,1595 ; U10.18 1622.7,1640 1596.87,1614.17 1199.17,1614.17 1180,1595 1080,1595
RST: C22.2 R40.1 SW2.2 U3.7 | length 1996.5
  Top Layer w10: v1(2157.48,1444.88) 2165.35,1444.88 2211.82,1491.35 2236.48,1491.35 U3.7 ; v1(2755.91,1287.4) 2799.21,1244.09 2799.21,397.64 2799.21,353.2 2799.21,262.05 SW2.2@2777.64,240.48 ; SW2.2 SW2.2@2777.64,240.48 ; C22.2 2833.2,194.88 2787.6,240.48 SW2.2@2777.64,240.48
  Bottom Layer w10: v1(2157.48,1444.88) 2598.43,1444.88 v1(2755.91,1287.4)
RX1: P8.1 U3.31 | length 497.6
  Top Layer w10: P8.1 1747.24,1952.76 U3.31
SCK: NRF1.4 U3.26 | length 364.4
  Top Layer w10: U3.26 2055,1784.19 2055,1799.59 2078.24,1822.83 2116.62,1822.83 2165.35,1871.57 2165.35,1969.65 NRF1.4
TX1: P8.3 U3.30 | length 547.2
  Top Layer w10: P8.3 1675.08,2052.76 U3.30
VM: C5.1 C6.2 C7.2 C25.1 C26.1 C27.1 P1.0 R5.1 U1.5 U4.7 U5.7 U6.7 U7.7 U8.7 U9.7 | length 5585.1
  Top Layer w10: R5.1@1717.56,561.99 1746,590.44 1746,625.92 C5.1 ; C27.1 1728.32,491.79 R5.1
  Top Layer w50: U8.7@3349.68,910 3470.71,910 3488.19,892.52 ; U7.7@3354.25,270.75 3465.75,270.75
  Top Layer w100: 920,615 842.52,692.48 842.52,1874.02 854.33,1885.83 860.91,1879.25 960,1879.25 ; 990.32,609.25 1002.95,609.25 ; 3366.14,1500 3421.26,1500 3488.19,1433.07 3488.19,892.52 3488.19,248.03
  Bottom Layer w200: C25.1@1188.74,787.4 1858.27,787.4 1995,650.67 1995,512 ; P1.0 1995,512 ; C26.1@3145,787.4 2413.4,787.4 2249,623 2106,623 1995,512
  other v1: 3294,146 3348.25,146 3402.5,146 3456.75,146 3511,146 3295,198 3349.25,198 3403.5,198 3457.75,198 3512,198 3515,657 821,659 875.25,659 929.5,659 983.75,659 3409.25,701 3463.5,701 3517.75,701 820,713 874.25,713 928.5,713 982.75,713 1218,713 3057,718 3019,720 1251,726 3407.25,751 3461.5,751 3515.75,751 1270,755 3057,761.67 3019,762.67 816,769 870.25,769 924.5,769 978.75,769 1250,782 3405.25,799 3459.5,799 3513.75,799 1274,803 3019,805.33 3057,805.33 1250,824 3510,844 3019,848 3057,849 820,1261 874.25,1261 928.5,1261 982.75,1261 1037,1261 818,1295 872.25,1295 926.5,1295 980.75,1295 1035,1295 3301,1418 3355.25,1418 3409.5,1418 3463.75,1418 3518,1418 3299,1460 3353.25,1460 3407.5,1460 3461.75,1460 3516,1460 815,1913 869.25,1913 923.5,1913 977.75,1913 1032,1913 814,1957 868.25,1957 922.5,1957 976.75,1957 1031,1957
pads on no net: U2.4 U3.2 U3.34 U3.37 U10.3 U10.12 U?.3 U?.12

## Polygon pours and split planes (outlines as drawn)
GND on Top Layer "NONET_L01_P010" (solid, remove dead copper, shelved, pour order 10): 410.76,2148 3984,2148 4102,2030 4102,146 3968,12 357,12 234,135 234,1984.7
GND on Bottom Layer "NONET_L02_P012" (solid, remove dead copper, shelved, pour order 12): 409,2147 3984,2147 4102,2029 4102,147 4103,146 3970,13 354,13 236,131 234,131 234,1983

## Other copper
Top Layer:
  rectangle net GND: 3236,565 3419,644
  rectangle net GND: 3267,1200 3418,1283
  rectangle net GND: 881,86 1091,290
  rectangle net GND: 912,874 1114,926
  rectangle net GND: 911,1474 1063,1559
  rectangle net M_A: 233,197 776,671
  rectangle net M_B: 240,824 767,1298
  rectangle net M_C: 238,1456 778,1932
  rectangle net M2_A: 3557,197 4102,682
  rectangle net M2_B: 3563,825 4098,1300
  rectangle net M2_C: 3557,1454 4096,1930
  rectangle net 3V3: 2279.53,933.07 2366.14,1007.87
  rectangle net 3V3: 1988.19,1200 2065,1304.13
  rectangle net 3V3: 1610.24,1724.41 1775.59,1763.78
  rectangle net VM: 3263.78,1389.76 3539.37,1555.12
  rectangle net VM: 3267.72,114.17 3539.37,295.28
  rectangle net VM: 3259.84,807.09 3500,937.01
  rectangle net VM: 2994,687 3539.37,896
  rectangle net VM: 1031.5,676 1288,843
  rectangle net VM: 791.34,559.06 1086.61,842.52
  rectangle net VM: 834.65,1192.91 1059.06,1318.9
  rectangle net VM: 791.34,1830.71 1059.06,1984.25
  pour cut-out: 1177,219 1254,219 1302,171 1302,104 1255,57 1187,57 1140,104 1140,161
  pour cut-out: 3144,219 3192,171 3192,105 3144,57 3078,57 3030,105 3030,171 3078,219
  pour cut-out: 3077,2108 3145,2108 3192,2061 3192,1994 3144,1946 3078,1946 3030,1994 3030,2061
  pour cut-out: 1217,2110 1253,2110 1301,2062 1301,1996 1253,1948 1186,1948 1139,1995 1139,2058.07 1183.35,2110
  pour cut-out: 1596,1034 1598,1032 1759,1032 1759,850 1756,853 1598,853
  pour cut-out: 2456,1017 2465.5,1007.5 2552,934 2750.61,1161.39 2761,1171.78 2747,1192 2657,1261
  pour cut-out: 2384,1096 2366,1096 2235,1218 2533.62,1571.58 2556,1560 2590,1535 2678.5,1446.5 2472,1197 2453,1172
  pour cut-out: 2384,1096 2267,1195 2243,1214 2243,1224 2503.22,1535.22 2533.62,1571.58 2558,1551 2680,1448 2435,1157 2405,1116
  region: 1964.57,1598.43
  region net 3V3: 2062.99,1023.62 2023.62,1023.62 2003.94,1043.31 2003.94,1212.6 1988.19,1228.35 1988.19,1259.84 2076.77,1348.43 2110.24,1314.96 2110.24,1311.02 2047.24,1248.03 2047.24,1224.41 2062.99,1208.66 2062.99,1047.24
  region net 3V5: 1740.16,1059.05 1732.28,1051.18 1732.28,984.25 1629.92,984.25 1625.98,988.19 1625.98,1090.55 1649.61,1114.17 1740.16,1114.17 1771.65,1145.67 1905.51,1145.67 1964.57,1086.61 1964.57,1023.62 1917.32,1023.62 1909.45,1015.75 1771.65,1015.75 1771.65,1051.18 1763.78,1059.06
  region net NetC1_1: 1637.4,740.16 1669.29,704.72 1669.29,681.1 1712.6,681.1 1712.6,740.16 1732.28,759.84 1732.28,897.64 1724.41,905.51 1633.86,905.51 1625.98,897.64 1625.98,811.02 1586.61,771.65 1586.61,763.78 1610.24,740.16
  region net VM: 1844.57,618.11 1732.28,618.11 1716.54,641.73 1669.29,641.73 1669.29,665.35 1716.54,665.35 1720.47,661.42 1874.02,661.42 1889.76,645.67 2072.33,645.67 2155,563 2155,265 2129,239 1878,239 1878,584.68
Bottom Layer:
  rectangle net VM: 1860,230 2156,720
  rectangle net M2_A: 3703,198 4100,672
  rectangle net M2_B: 3707,827 4094,1294
  rectangle net M2_C: 3705,1460 4100,1925
  rectangle net M_A: 239,196 633,668
  rectangle net M_B: 243,824 627,1297
  rectangle net M_C: 239,1461 633,1924
  rectangle net VM: 3233,99 3601,300
  rectangle net VM: 3323,99 3601,1537
  rectangle net VM: 3260,1374 3601,1558
  rectangle net VM: 956,1213 1068,1346
  rectangle net VM: 952,1892 1061,1995
  rectangle net VM: 707,556 1014,2001
  rectangle net 3V3: 1990,1201 2069,1303
  rectangle net 3V3: 2267.72,933.07 2358.27,1027.56
  pour cut-out: 1177.32,219 1254,219 1303,170 1303,107 1253,57 1187,57 1140,104 1140,160.82
  pour cut-out: 3078,219 3144,219 3192,171 3192,105 3144,57 3078,57 3030,105 3030,171
  pour cut-out: 3108,2108 3144,2108 3192,2060 3192,1994 3144,1946 3078,1946 3030,1994 3030,2061 3077,2108
  pour cut-out: 1183,2110 1253,2110 1301,2062 1301,1995 1300,1995 1253,1948 1186,1948 1139,1995 1139,2058

## Silkscreen, mask and mechanical layers (free items; w line width, h text height)
Top Overlay:
  lines w0.5: 236.47,197.1 236.47,669.54 630.17,669.54 630.17,197.1 236.47,197.1 ; 236.47,827.02 236.47,1299.46 630.17,1299.46 630.17,827.02 236.47,827.02 ; 236.47,1456.94 236.47,1929.38 630.17,1929.38 630.17,1456.94 236.47,1456.94 ; 237.46,197.62 631.16,197.62 631.16,670.06 237.46,670.06 237.46,197.62 ; 237.46,827.54 237.46,1299.98 631.16,1299.98 631.16,827.54 237.46,827.54 ; 237.46,1457.46 237.46,1929.9 631.16,1929.9 631.16,1457.46 237.46,1457.46 ; 1968.75,1870.33 2362.45,1870.33 2362.45,2067.18 1968.75,2067.18 1968.75,1870.33 ; 1969.75,1870.85 2363.45,1870.85 2363.45,2067.7 1969.75,2067.7 1969.75,1870.85 ; 3701.04,197.1 4094.74,197.1 4094.74,669.54 3701.04,669.54 3701.04,197.1 ; 3701.04,827.02 4094.74,827.02 4094.74,1299.46 3701.04,1299.46 3701.04,827.02 ; 3701.04,1456.94 4094.74,1456.94 4094.74,1929.38 3701.04,1929.38 3701.04,1456.94 ; 3702.03,197.62 4095.73,197.62 4095.73,670.06 3702.03,670.06 3702.03,197.62 ; 3702.03,827.54 4095.73,827.54 4095.73,1299.98 3702.03,1299.98 3702.03,827.54 ; 3702.03,1457.46 4095.73,1457.46 4095.73,1929.9 3702.03,1929.9 3702.03,1457.46
  text "3V3" at 2861,2126 h30
  text "S" at 2781,2124 h30
  text "G" at 2683,2123 h30
  text "SCK" at 2079,2085 h30
  text "CE" at 2196,2085 h30
  text "GND" at 2274,2085 h30
  text "A5" at 2958,2044 h30
  text "A4" at 2957,1950 h30
  text "M_C" at 249,1917 h30 r270
  text "V" at 2381,1894 h30
  text "CSN" at 2173,1828 h30
  text "MO" at 2092,1827 h30
  text "IRQ" at 1982,1825 h30
  text "M2_C" at 4082,1809 h30 r90
  text "M_C" at 249,1547 h30 r270
  text "M2_C" at 4080,1469 h30 r90
  text "M_B" at 253,1290 h30 r270
  text "M2_B" at 4082,1185 h30 r90
  text "M_B" at 252,918 h30 r270
  text "M2_B" at 4083,833 h30 r90
  text "M_A" at 250,660 h30 r270
  text "M2_A" at 4085,554 h30 r90
  text "M_A" at 254,298 h30 r270
  text "+24V" at 1936,234 h30
  text "GND" at 2298,234 h30
  text "M2_A" at 4082,205 h30 r90
Bottom Overlay:
  circle w0.5: c1182.34,886.59 r196.85
  circle w0.5: c3150.85,886.59 r196.85
  circle w0.5: c1181.35,886.08 r196.85
  circle w0.5: c3149.86,886.08 r196.85
  text "M2_C" at 4080,1964 h30 r90
  text "M_C" at 250,1885 h30 r270
  text "M2_C" at 4081,1523 h30 r90
  text "M_C" at 250,1429 h30 r270
  text "M2_B" at 4081,1340 h30 r90
  text "M_B" at 256,1246 h30 r270
  text "M2_B" at 4086,886 h30 r90
  text "M_B" at 252,810 h30 r270
  text "M2_A" at 4085,702 h30 r90
  text "M_A" at 249,621 h30 r270
  text "GND" at 1741,552 h30
  text "GND" at 2662,546 h30
  text "g" at 1734,456 h30
  text "g" at 2621,451 h30
  text "b" at 1728,354 h30
  text "b" at 2619,351 h30
  text "M2_A" at 4079,279 h30 r90
  text "y" at 1726,253 h30
  text "y" at 2622,250 h30
  text "GND" at 2299,230 h30 r180
  text "+24V" at 2050,201 h30
  text "M_A" at 246,160 h30 r270
  text "3V3" at 1750,151 h30
  text "3V3" at 2662,148 h30
  text "HALL" at 1862,33 h30
  text "HALL2" at 2573,33 h30
Mechanical 1:
  the board outline again, w0.5
Mechanical 7:
  circle w0.5: c1221.71,2028.33 r61.02
  circle w0.5: c3111.48,2028.33 r61.02
  circle w0.5: c1221.71,138.56 r61.02
  circle w0.5: c3111.48,138.56 r61.02
  circle w0.5: c1220.72,2027.81 r61.02
  circle w0.5: c3110.49,2027.81 r61.02
  circle w0.5: c1220.72,138.05 r61.02
  circle w0.5: c3110.49,138.05 r61.02

## Text inside footprints (layer, text, board x,y; h text height)
NRF1: Top Overlay "MISO" at 1947,2085 h30
P8: Top Overlay "RX1" at 1695,1934 h30; Top Overlay "3V3" at 1373,1929 h30; Top Overlay "GND" at 1373,2038 h30; Top Overlay "TX1" at 1693,2035 h30